# Altium PCB PCB.PcbDoc
Units mm, origin at the board's own origin, x right, y up, seen from the top; angles counter-clockwise.
Board outline 29 x 81.5 mm, 2 copper layers (Top Layer, Bottom Layer); 22 components, 13 nets, 80 pads, 19 vias.
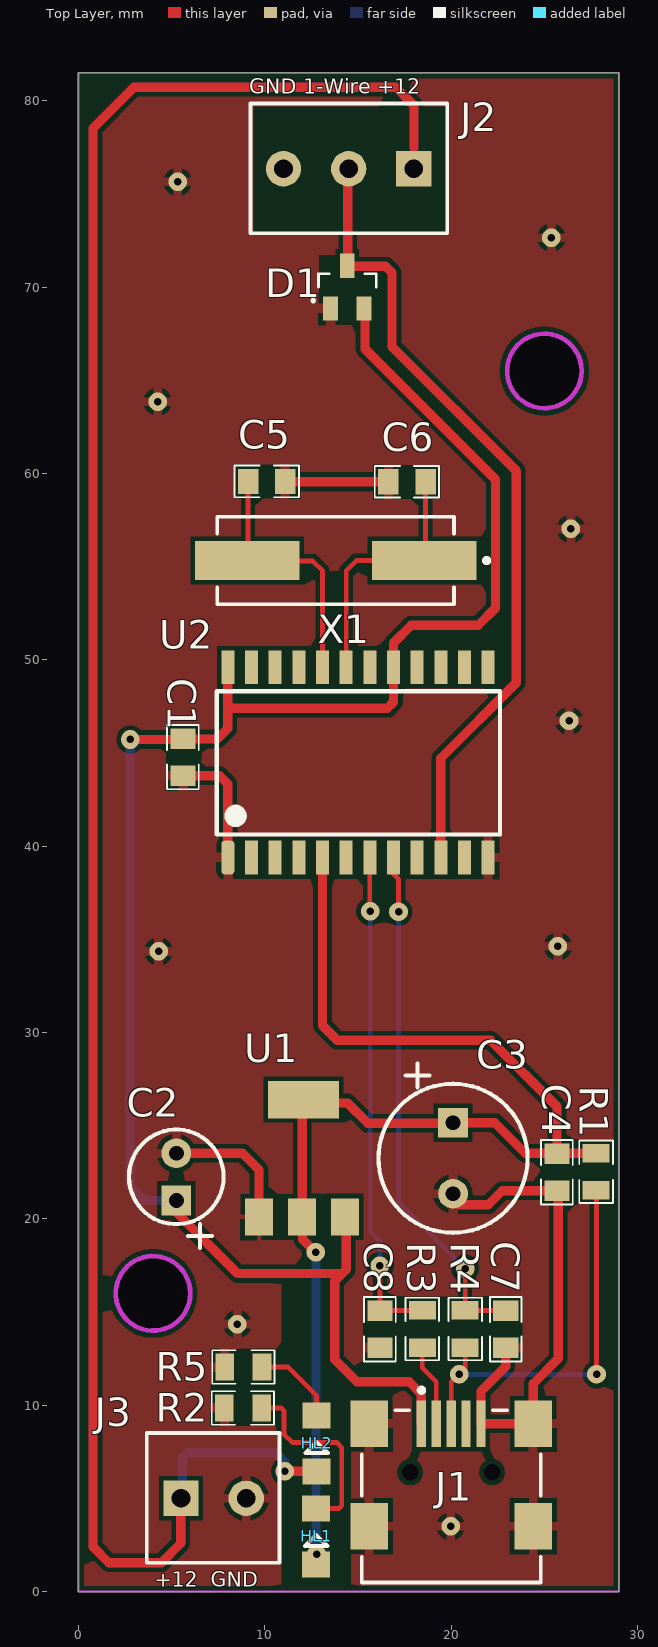
[diagram p0: Top Layer view]
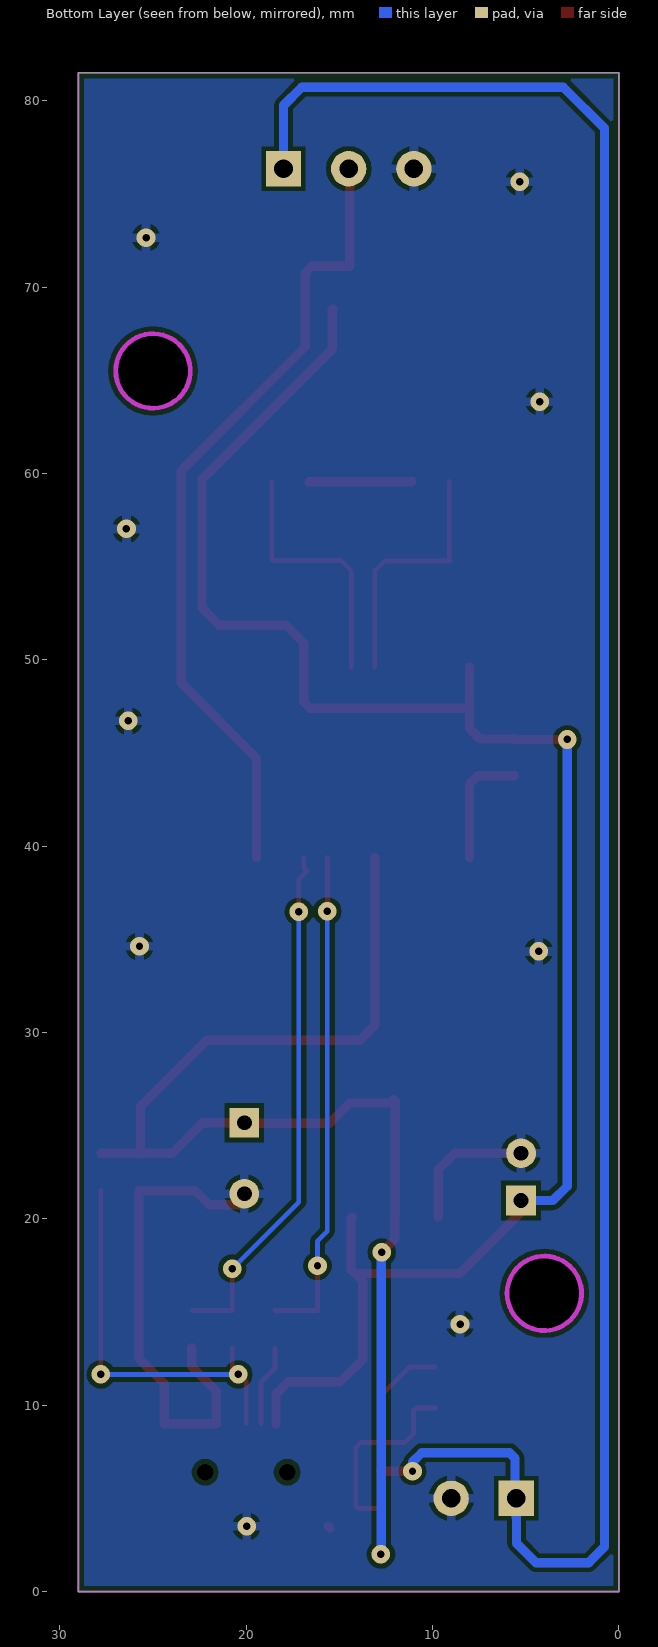
[diagram p1: Bottom Layer view, seen from below]
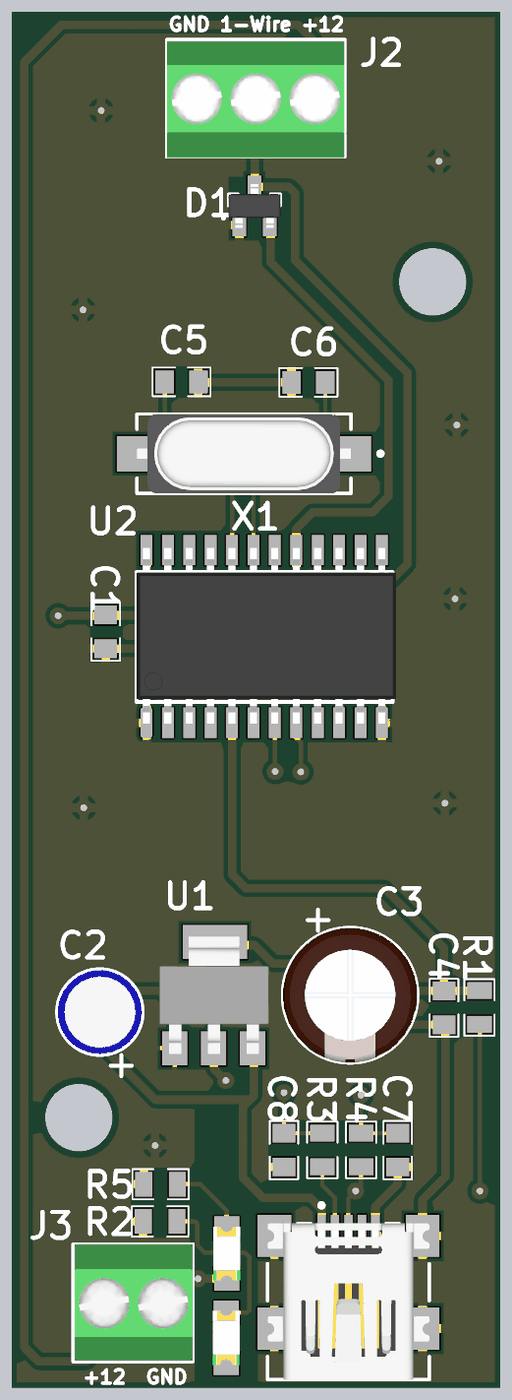
[diagram p2: 3D render of the assembled board from above, using the file's embedded part models]

## Layer stack, top to bottom
Top Solder: solder mask 0.0102, Solder Resist, Dk 3.5
Top Layer: signal copper 0.0356
Dielectric 1: dielectric 0.32, FR-4, Dk 4.8
Bottom Layer: signal copper 0.0356
Bottom Solder: solder mask 0.0102, Solder Resist, Dk 3.5

## Board outline
0,0 0,81.5 29,81.5 29,0
cut-out: 25,63.5 cw(c25,65.5) 23,65.5 cw(c25,65.5) 25,67.5 cw(c25,65.5) 27,65.5 cw(c25,65.5)
cut-out: 4,14 cw(c4,16) 2,16 cw(c4,16) 4,18 cw(c4,16) 6,16 cw(c4,16)

## Design rules (kind name [scope] priority, off if disabled: settings)
Clearance [All] p1: gap=0.254 ignorepadtopadclearanceinfootprint=FALSE except(0: Arc-Hole Track-Hole SMDPad-Hole THPad-Hole Via-Hole Fill-Hole Poly-Hole Region-Hole Text-Hole)
MinimumSolderMaskSliver [All] p1: minsoldermaskwidth=0.05
PolygonConnect [All] p1: connectstyle=Relief reliefconductorwidth=0.5 reliefentries=4 polygonreliefangle="90 Angle" airgapwidth=0.254
RoutingVias [All] p1: holewidth=0.5 width=1 viastyle="Through Hole" minholewidth=0.3 minwidth=0.8 maxholewidth=0.8 maxwidth=1.27
SilkToSolderMaskClearance [IsPad] p1: minsilkscreentomaskgap=0.05 clearancetoexposedcopper=TRUE
SolderMaskExpansion [All] p1: expansion=0.102
Width +12 [InNet('+12')] p1: maxlimit=0.8 minlimit=0.254 preferedwidth=0.5 minimp=50.000000 maximp=50.000000 favimp=50.000000
Width +5 [InNet('+5')] p2: maxlimit=1 minlimit=0.254 preferedwidth=0.5 minimp=50.000000 maximp=50.000000 favimp=50.000000
Width 1-WIRE [InNet('1-Wire')] p3: maxlimit=1 minlimit=0.254 preferedwidth=0.5 minimp=50.000000 maximp=50.000000 favimp=50.000000
Width +3.3 [InNet('+3.3')] p4: maxlimit=0.8 minlimit=0.254 preferedwidth=0.5 minimp=50.000000 maximp=50.000000 favimp=50.000000
Width +3.3_1 [InNet('NetC3_2')] p5: maxlimit=1 minlimit=0.254 preferedwidth=0.5 minimp=50.000000 maximp=50.000000 favimp=50.000000
Width GND [InNet('GND')] p6: maxlimit=0.8 minlimit=0.254 preferedwidth=0.5 minimp=50.000000 maximp=50.000000 favimp=50.000000
Width [All] p7: maxlimit=0.254 minlimit=0.254 preferedwidth=0.254
28 further rules are at their usual default settings.

## Components (designator, comment, footprint, x,y, rotation, side; value= is the part's Value field where it differs from the comment)
C1 "CAP_SMD" CAP0805 5.6,44.775 r90 top
C2 "CAP_ELEC_5*11" CAP_ELEC_5*11 5.25,22.25 r90 top
C3 "CAP_ELEC_8*11" CAP_ELEC_8*11 20.1,23.25 r270 top
C4 "CAP_SMD" CAP0805 25.675,22.5 r90 top
C5 "CAP_SMD" CAP0805 10.1,59.575 r0 top
C6 "CAP_SMD" CAP0805 17.625,59.55 r180 top
C7 "CAP_SMD" CAP0805 22.925,14.077 r90 top
C8 "CAP_SMD" CAP0805 16.175,14.077 r90 top
D1 "BAT54S" "SOT23 - 123" 14.425,70 r90 top
HL1 "LED_SMD" 1206_Led 12.75,2.954 r90 top
HL2 "LED_SMD" 1206_Led 12.775,7.95 r90 top
J1 "USB-5-4SHLD" MINI-USB_2.0 20,6.25 r0 top
J2 "KF120-03P-14" KF350-3.5-03P 18,76.35 r180 top
J3 "KF120-02P-14" KF350-3.5-02P 5.5,5 r0 top
R1 "RES_SMD" RES0805 27.775,22.525 r90 top
R2 "RES_SMD" RES0805 8.825,9.85 r0 top
R3 "RES_SMD" RES0805 18.45,14.086 r90 top
R4 "RES_SMD" RES0805 20.75,14.086 r90 top
R5 "RES_SMD" RES0805 8.85,12.05 r0 top
U1 "AMS1117 3.3V" SOT223-4 12,23.25 r0 top
U2 "DS2490" SOIC-24/300 15,44.5 r90 top
X1 "" Crystal_SMD 13.8,55.325 r180 top

## Footprints (in the part's own frame and the unit in brackets; to place one, negate y for a bottom-side part, rotate by r counter-clockwise, add the part's x,y. Pads: shape width x height; smd on the part's side, far side on the other; paste and mask are expansions set on the pad)
1206_Led [mm] "Chip LED, 2-Leads, Body 3.2x1.6mm, IPC Medium Density"
  rect 1.4x1.5 smd: 1(-1.5,0) 2(1.5,0)
  silkscreen extent -0.52,-0.6 0.08,0.6, body extent -1.6,-0.8 1.6,0.8, height 0.68
CAP0805 [mm] "Chip Capacitor, 2-Leads, Body 2,00x1,20mm, IPC Medium Density"
  rect 1.1x1.35 smd: 1(-1,0) 2(1,0)
  silkscreen extent -1.73,-0.85 1.73,0.85, body extent -1,-0.6 1,0.6, height 0.4
CAP_ELEC_5*11 [mm]
  round 1.6 hole 0.8: 1(1.27,0)
  rect 1.6x1.6 hole 0.8: 2(-1.27,0)
  silkscreen extent -3.81,-2.54 2.54,2.54, body extent -2.5,-2.5 2.5,2.5, height 11.9
CAP_ELEC_8*11 [mm]
  round 1.6 hole 0.8: 1(1.905,0)
  rect 1.6x1.6 hole 0.8: 2(-1.905,0)
  silkscreen extent -5.08,-4 4,4, body extent -4,-4 4,4, height 11
Crystal_SMD [mm] "SMD, 2-Leads, Body 11.4x4.7mm"
  rect 5.6x2.1 smd: 1(-4.75,0) 2(4.75,0)
  silkscreen extent -8.23,-2.35 6.35,2.35, body extent -6.35,-2.35 6.35,2.35, height 4.16
KF350-3.5-02P [mm]
  rect 1.9x1.9 hole 1 mask+0.102: 1(0,0)
  round 1.9 hole 1 mask+0.102: 2(3.5,0)
  silkscreen extent -1.84,-3.46 5.28,3.5, body extent -1.75,-3.4 5.25,3.5, height 8.8
KF350-3.5-03P [mm]
  rect 1.9x1.9 hole 1 mask+0.102: 1(0,0)
  round 1.9 hole 1 mask+0.102: 2(3.5,0) 3(7,0)
  silkscreen extent -1.79,-3.51 8.77,3.45, body extent -1.75,-3.4 8.75,3.5, height 8.8
MINI-USB_2.0 [mm] "SMD, 5-Leads, Body 9.6x9.25mm, Pitch 0.8mm"
  rect 0.5x2.5 smd: 1(-1.6,2.75) 2(-0.8,2.75) 3(0,2.75) 4(0.8,2.75) 5(1.6,2.75)
  rect 2x2.5 smd: 6(-4.4,2.75) 7(4.4,2.75) 8(-4.4,-2.75) 9(4.4,-2.75)
  round 0.6 hole 0.9 unplated: MH1(-2.2,0.15) MH2(2.2,0.15)
  silkscreen extent -4.8,-5.77 4.8,4.68, body extent -4.8,-5.77 4.8,3.48, height 3.9
RES0805 [mm] "Chip Resistor, 2-Leads, Body 2,00x1,20mm, IPC Medium Density"
  rect 1x1.45 smd: 1(-1,0) 2(1,0)
  silkscreen extent -1.68,-0.9 1.68,0.9, body extent -1,-0.6 1,0.6, height 0.4
SOIC-24/300 [mm] "SOIC, 24-Leads, Pitch 1,27mm"
  rrect50% 1.8x0.7 smd: 1(-5.111,6.985)
  rect 1.8x0.7 smd: 2(-5.111,5.715) 3(-5.111,4.445) 4(-5.111,3.175) 4(-5.111,3.175) 5(-5.111,1.905) 6(-5.111,0.635) 7(-5.111,-0.635) 8(-5.111,-1.905) 9(-5.111,-3.175) 10(-5.111,-4.445) 11(-5.111,-5.715) 12(-5.111,-6.985) 13(5.111,-6.985) 14(5.111,-5.715) 15(5.111,-4.445) 16(5.111,-3.175) 17(5.111,-1.905) 18(5.111,-0.635) 19(5.111,0.635) 20(5.111,1.905) 21(5.111,3.175) 22(5.111,4.445) 23(5.111,5.715) 24(5.111,6.985)
  silkscreen extent -3.89,-7.62 3.81,7.58, body extent -5.16,-7.83 5.24,7.57, height 2.6
"SOT23 - 123" [mm]
  rect 1.3x0.8 smd: 1(-1.15,0.9) 2(-1.15,-0.9) 3(1.15,0)
  silkscreen extent -0.72,-1.55 0.71,1.84, body extent -1.3,-1.55 1.3,1.55, height 1.15
SOT223-4 [mil]
  rect 59x79 smd: 1(-91,-124) 2(0,-124) 3(91,-124)
  rect 150x79 smd: 4(3,124)
  body extent -127,-136 129,136, height 64

## Part data
C1 C4 C5 C6 C7 C8: "Ceramic capacitor, 0805"
  C1 C4: Val=100nF
  C5 C6 C7 C8: Val=33pF
C2 C3: "Electrolitic capacitor"
  C2: Val=10uF
  C3: Val=100uF
HL1 HL2: "0805 led"
J1: library part MINI_USB-5-4SHLD
J2: library part Terminal_3, "Euro Terminal Block, 6 A, 150 V, -40 to 105 degC, Pitch 2.54 mm, 1x3 Position, Height 8.6 mm, Tail Length 3.3 mm", Color=Green, Contact Resistance="20 mOhm", Insulation Resistance="5000 mOhm / 1000 V", Manufacturer="Cixi KaiFeng", Rated Current="6 A", Rated Voltage="150 V", Temp. Range="-40 to 105 degC", Withstanding Voltage="AC 1500 V / 1 Min", ComponentLink1Description="Manufacturer URL", ComponentLink1URL=http://www.nb-kaifeng.com/, ComponentLink2Description=Datasheet, ComponentLink2URL=http://www.nb-kaifeng.com/upload/editor/ext_pdf/201305290533107785.pdf, ComponentLink3Description="Package Specification", ComponentLink3URL=http://www.nb-kaifeng.com/upload/editor/ext_pdf/201305290533202245.pdf, Contact=Brass, DatasheetVersion=Dec-13, Mounting Technology="Through Hole", No. of Pole=3, PackageDescription="Terminal Block, Pitch 2.54 mm, 1 x 3 Position, Height 8.6 mm, Tail Length 3.3 mm", PackageReference=CXKF-KF120-3, PackageVersion=Dec-13, PartNumber=KF120-03P-14, Pitch="Single Pitch"
J3: library part Terminal_2, "Euro Terminal Block, 6 A, 150 V, -40 to 105 degC, Pitch 2.54 mm, 1x2 Position, Height 8.6 mm, Tail Length 3.3 mm", Color=Green, Contact Resistance="20 mOhm", Insulation Resistance="5000 MOhm / 1000 V", Manufacturer="Cixi KaiFeng", Rated Current="6 A", Rated Voltage="150 V", Temp. Range="-40 to 105 degC", Withstanding Voltage="AC 1500 V / 1 Min", ComponentLink1Description="Manufacturer URL", ComponentLink1URL=http://www.nb-kaifeng.com/, ComponentLink2Description=Datasheet, ComponentLink2URL=http://www.nb-kaifeng.com/upload/editor/ext_pdf/201305290533202245.pdf, Contact=Brass, Mounting Technology="Through Hole", No. of Pole=2, PackageDescription="Terminal Block, Pitch 2.54 mm, 1 x 2 Position, Height 8.6 mm, Tail Length 3.3 mm", PackageReference=KF120-2, PartNumber=KF120-02P-14, Pitch="Single Pitch"
U1: library part AMS1117, "Voltage regulator"
U2: "DS2490, SO-24"
X1: library part Crystal, "Low Profile Crystal", Case Height=4.2mm, Case Length=11.4mm, Case Width=4.7mm, Frequency=12MHz, Frequency Stability=50PPM, Load Capacitance=18pF, Manufacturer=ABRACON, Operating Temperature Range=-20Cto+70C, Package / Case=HC-49/US, Package Description="2-Pin Surface Mount Device, Body 11.4 x 4.7 mm", Package Reference=ABLS-14.7456MHZ-B2-T, Tolerance=30PPM, Brand=ABRACON, Datasheet URL=http://www.abracon.com/Resonators/abls.pdf, Datasheet Version=04/2011, Dimensions=4.7mmWx11.4mmLx4.2mmH, ESR=80Ohms, Factory Pack Quantity=1000, Manufacturer URL=http://www.abracon.com/, Mounting Style=SMD/SMT, Mounting Technology=SurfaceMount, Package URL=http://www.abracon.com/Support/PackageDrawing/Resonators/ABLS-2D.pdf, Packaging=Reel, Product Category=Crystals, RoHS=Details, Series=ABLS, Termination Style=SMD/SMT, Type=LowProfileMicroprocessorCrystal
R1: Val=1.5K
R2 R5: Val=750
R3 R4: Val=24

## Via types
v1: diameter 1, hole 0.4, Top Layer to Bottom Layer, tented both sides, 19 vias

## Nets (pads, with @x,y where several pads share a name; then routed paths per layer and width w, separated by ;. In a path a pad name is that pad's centre, name@x,y a point inside that pad or via, vN(x,y) a via of type N, cw(c..) or ccw(c..) an arc to the next point about the centre after c; other vN are vias at no path point)
1-Wire: D1.3 J2.2 U2.10 | length 43.6
  Top Layer w0.5: J2.2 14.45,76.3 14.45,71.125 16.475,71.125 16.825,70.775 16.825,66.8 23.5,60.125 23.5,48.775 19.445,44.72 U2.10
+3.3: C3.2 C4.2 HL1.1 R1.2 U1.2 U1.4 U2.5 | length 67.9
  Top Layer w0.5: v1(12.725,18.2) 12.025,18.9 12.025,20.075 U1.2 12,26.323 U1.4 12.259,26.217 14.438,26.217 15.53,25.125 19.78,25.125 C3.2@20.25,24.655 ; U2.5 13.095,30.38 13.9,29.575 22.125,29.575 25.675,26.025 C4.2@25.675,23.525 ; C3.2 22.345,25.155 23.975,23.525 C4.2@25.675,23.525 ; C4.2 C4.2@25.675,23.525 ; R1.2 C4.2@25.675,23.525
  Bottom Layer w0.5: v1(12.725,18.2) 12.75,18.175 12.75,2.021 v1(12.775,1.996)
+5: C1.2 C2.2 D1.2 J1.1 U1.3 U2.17 U2.24 | length 98.8
  Top Layer w0.5: v1(2.775,45.725) 5.55,45.725 C1.2 5.625,45.75 7.45,45.75 8.015,46.315 8.015,47.4 ; C2.2 5.25,20.35 8.539,17.061 14.15,17.061 ; U2.24 8.015,47.4 ; U1.3 14.375,20.037 14.375,17.286 14.15,17.061 ; D1.2@15.35,68.825 15.375,68.8 15.375,66.675 22.375,59.675 22.375,52.775 21.45,51.85 17.855,51.85 16.905,50.9 U2.17 16.905,47.73 16.575,47.4 8.015,47.4 ; J1.1 18.4,10.6 17.75,11.25 14.95,11.25 13.75,12.45 13.75,16.661 14.15,17.061
  Bottom Layer w0.5: v1(2.775,45.725) 2.775,21.75 3.545,20.98 C2.2
+12: HL2.1 J2.1 J3.1 | length 219
  Top Layer w0.5: 5.5,4 5.493,3.993 5.493,2.593 4.45,1.55 1.625,1.55 0.775,2.4 0.775,16.4 0.775,78.521 2.979,80.725 17.025,80.725 18,79.75 18,77.5 ; v1(11.075,6.457) 12.768,6.457 HL2.1
  Bottom Layer w0.5: 5.5,4 5.493,3.993 5.493,2.593 4.45,1.55 1.625,1.55 0.775,2.4 0.775,17.588 0.775,78.521 2.979,80.725 17.025,80.725 18,79.75 J2.1 ; J3.1 5.575,5.075 5.575,7.157 5.868,7.45 10.575,7.45 11.075,6.95 v1(11.075,6.457)
D+: J1.3 R1.1 R4.1 | length 21.7
  Top Layer w0.254: J1.3 20,11.25 20.75,12 R4.1 ; R1.1 27.8,21.5 v1(27.8,11.65)
  Bottom Layer w0.254: v1(20.425,11.65) v1(27.8,11.65)
D-: J1.2 R3.1 | length 4.4
  Top Layer w0.254: R3.1 18.45,12 19.2,11.25 J1.2
GND: C1.1 C2.1 C3.1 C4.1 C5.2 C6.2 C7.1 C8.1 D1.1 J1.5 J1.6 J1.7 J1.8 J1.9 J2.3 J3.2 R2.1 R5.1 U1.1 U2.1 U2.12 | length 45.9
  Top Layer w0.5: C2.1 8.805,23.52 9.689,22.636 U1.1 ; C1.1 7.575,43.775 8.015,43.335 U2.1 ; C5.2 11.125,59.55 C6.2 ; J1.8@15.5,3.4 J1.8 ; C3.1@20.25,20.845 20.345,20.75 21.985,20.75 22.735,21.5 C4.1 25.75,21.5 25.75,12.5 24.4,11.15 J1.7 J1.5 21.6,10.75 22.925,12.075 C7.1
  other v1: 19.975,3.5 8.525,14.35 4.3,34.35 25.725,34.625 26.325,46.725 26.425,57.025 4.25,63.85 25.375,72.65 5.325,75.65
NetC5_1: C5.1 U2.20 X1.2 | length 13.7
  Top Layer w0.254: C5.1 9.1,55.375 X1.2 9.075,55.3 12.575,55.3 13.095,54.78 U2.20
NetC6_1: C6.1 U2.19 X1.1 | length 13.8
  Top Layer w0.254: U2.19 14.365,54.79 14.9,55.325 X1.1 18.625,55.4 C6.1
NetC7_2: C7.2 R4.2 U2.8 | length 28.2
  Top Layer w0.254: U2.8 16.905,38.839 16.733,38.667 17.176,38.224 v1(17.176,36.477) ; v1(20.75,17.325) R4.2 20.759,15.077 C7.2
  Bottom Layer w0.254: v1(17.176,36.477) 17.176,20.899 v1(20.75,17.325)
NetC8_2: C8.2 R3.2 U2.7 | length 26.8
  Top Layer w0.254: U2.7 15.635,36.515 v1(15.65,36.5) ; v1(16.175,17.475) C8.2 18.441,15.077 R3.2
  Bottom Layer w0.254: v1(15.65,36.5) 15.65,19.325 16.175,18.8 v1(16.175,17.475)
NetHL1_2: HL1.2 R2.2 | length 10.5
  Top Layer w0.254: R2.2 10.876,9.85 11.025,9.701 11.025,8.45 11.475,8 13.85,8 14.125,7.725 14.125,4.603 13.976,4.454 HL1.2
NetHL2_2: HL2.2 R5.2 | length 4.6
  Top Layer w0.254: R5.2 11.225,12.05 12.775,10.5 HL2.2
pads on no net: J1.4 J1.MH1 J1.MH2 U2.2 U2.3 U2.4 U2.6 U2.9 U2.11 U2.13 U2.14 U2.15 U2.16 U2.18 U2.21 U2.22 U2.23

## Polygon pours and split planes (outlines as drawn)
GND on Bottom Layer (solid, pour order 6): 0.125,81.375 28.875,81.375 28.925,0.075 0.075,0.075
GND on Top Layer (solid, pour order 0): 28.875,0.125 0.125,0.125 0.125,81.425 28.801,81.425

## Keep-outs
Keep-Out Layer:
  circle w0.254: c4,16 r2
  circle w0.254: c25,65.5 r2
  lines w0.1: 0,0 29,0 29,81.5 0,81.5 0,0

## Other copper
Top Layer:
  pour cut-out: 13.95,71.725 12.896,71.725 12.896,69.729 13.904,69.729 13.95,69.775
  pour cut-out: 16.25,68.05
  pour cut-out: 9.375,79.7 9.375,72.95 19.75,72.95 19.725,72.975 19.725,79.7
  pour cut-out: 10.878,16.5 10.878,0.4 14.625,0.4 14.625,10.875 14.006,13.029 14.006,16.5
Bottom Layer:
  pour cut-out: 19.95,82.375

## Silkscreen, mask and mechanical layers (free items; w line width, h text height)
Top Overlay:
  text "GND 1-Wire +12" at 9.175,80.375 h0.8
  text "+12  GND" at 4.098,0.257 h0.8